# Altium PCB PCB_Sensores_PIC24.PcbDoc (part 1 of 2)
Units mm, origin at the board's own origin, x right, y up, seen from the top; angles counter-clockwise.
Board outline 86.12 x 83.94 mm, 4 copper layers (Top Layer, Layer 1, Layer 4, Bottom Layer), stack 0.603 mm thick; 128 components, 84 nets, 499 pads, 63 vias.
Unrouted connection lines stored in the file: 68.
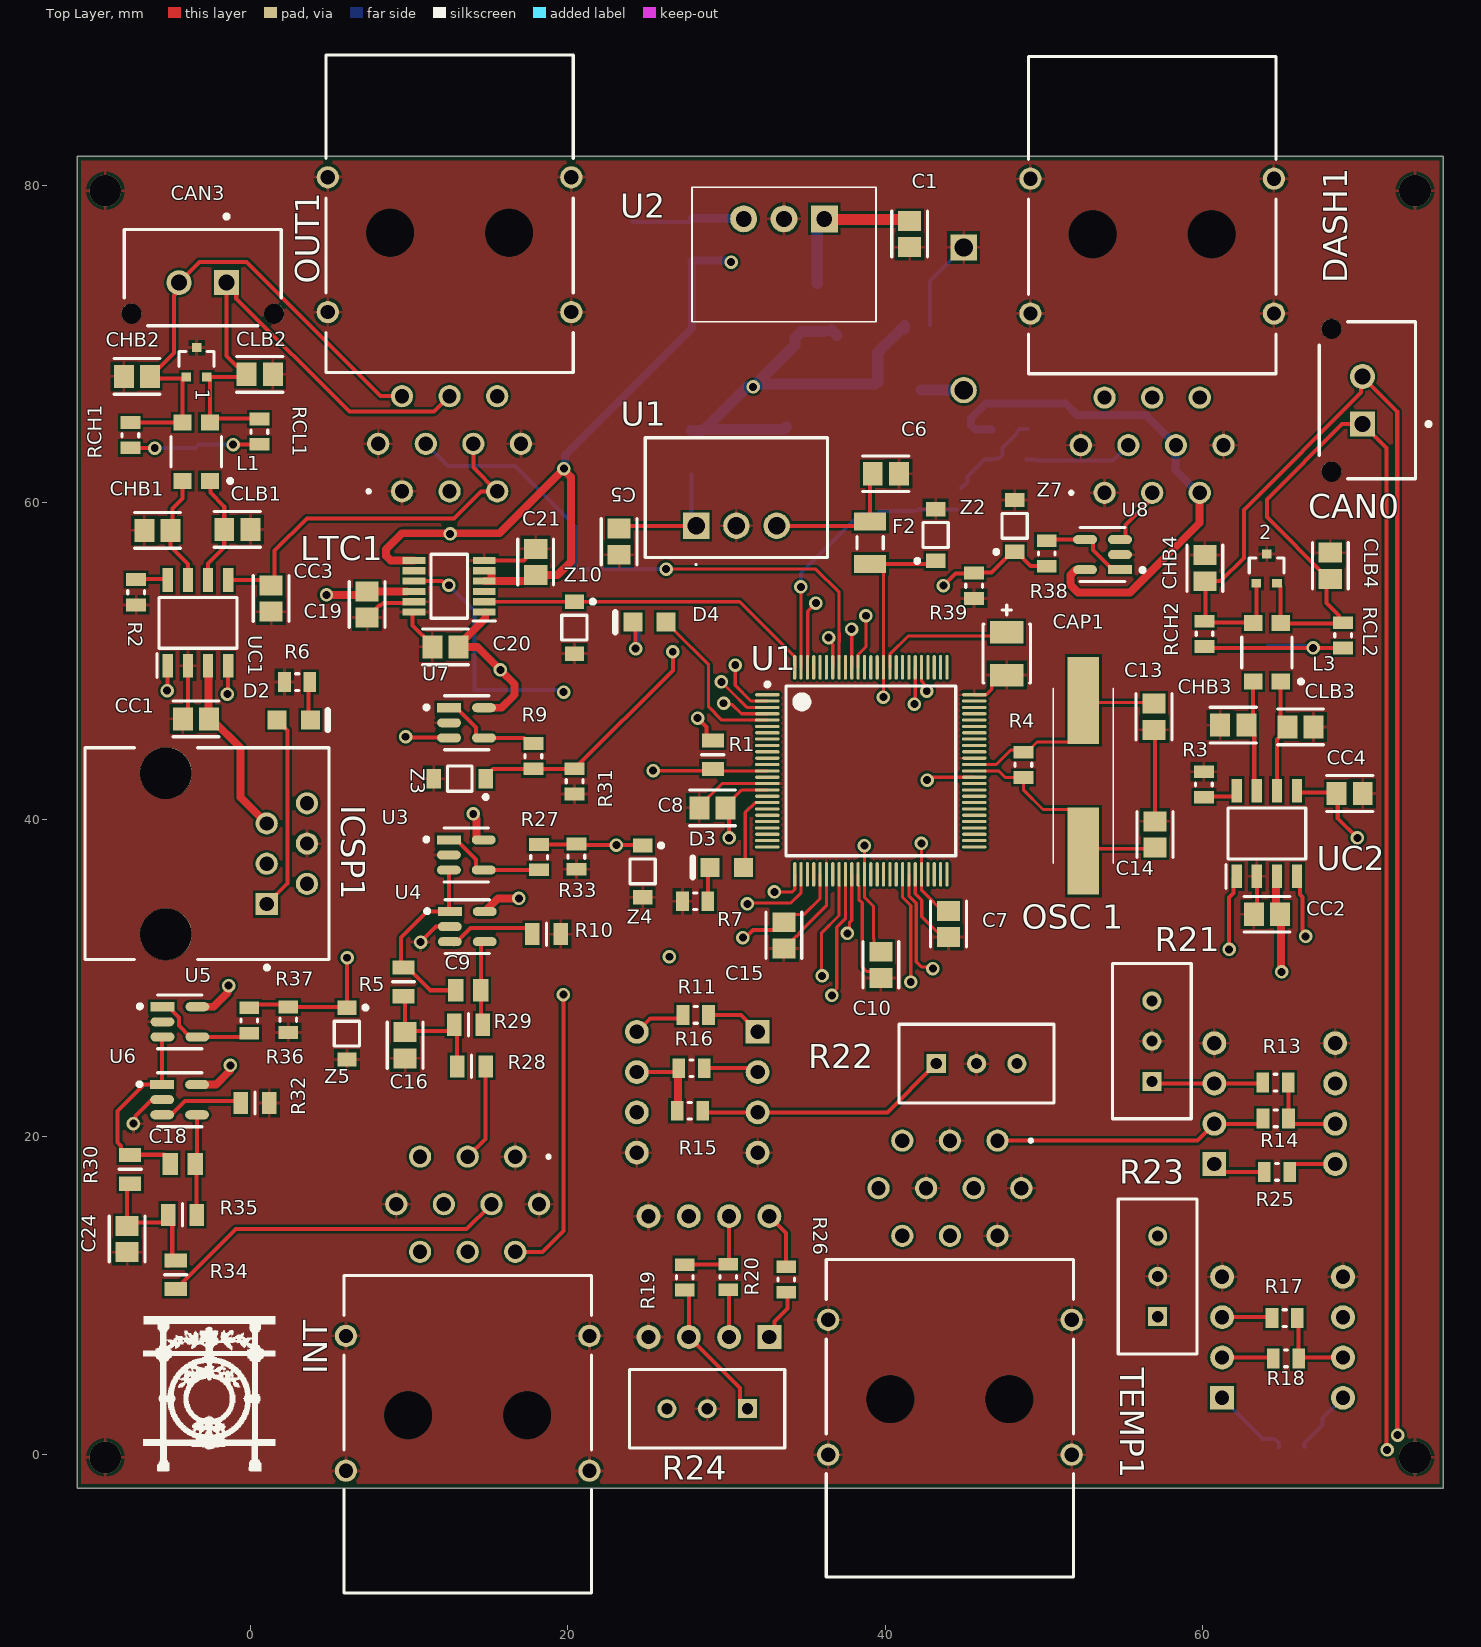
[diagram p0: Top Layer view]
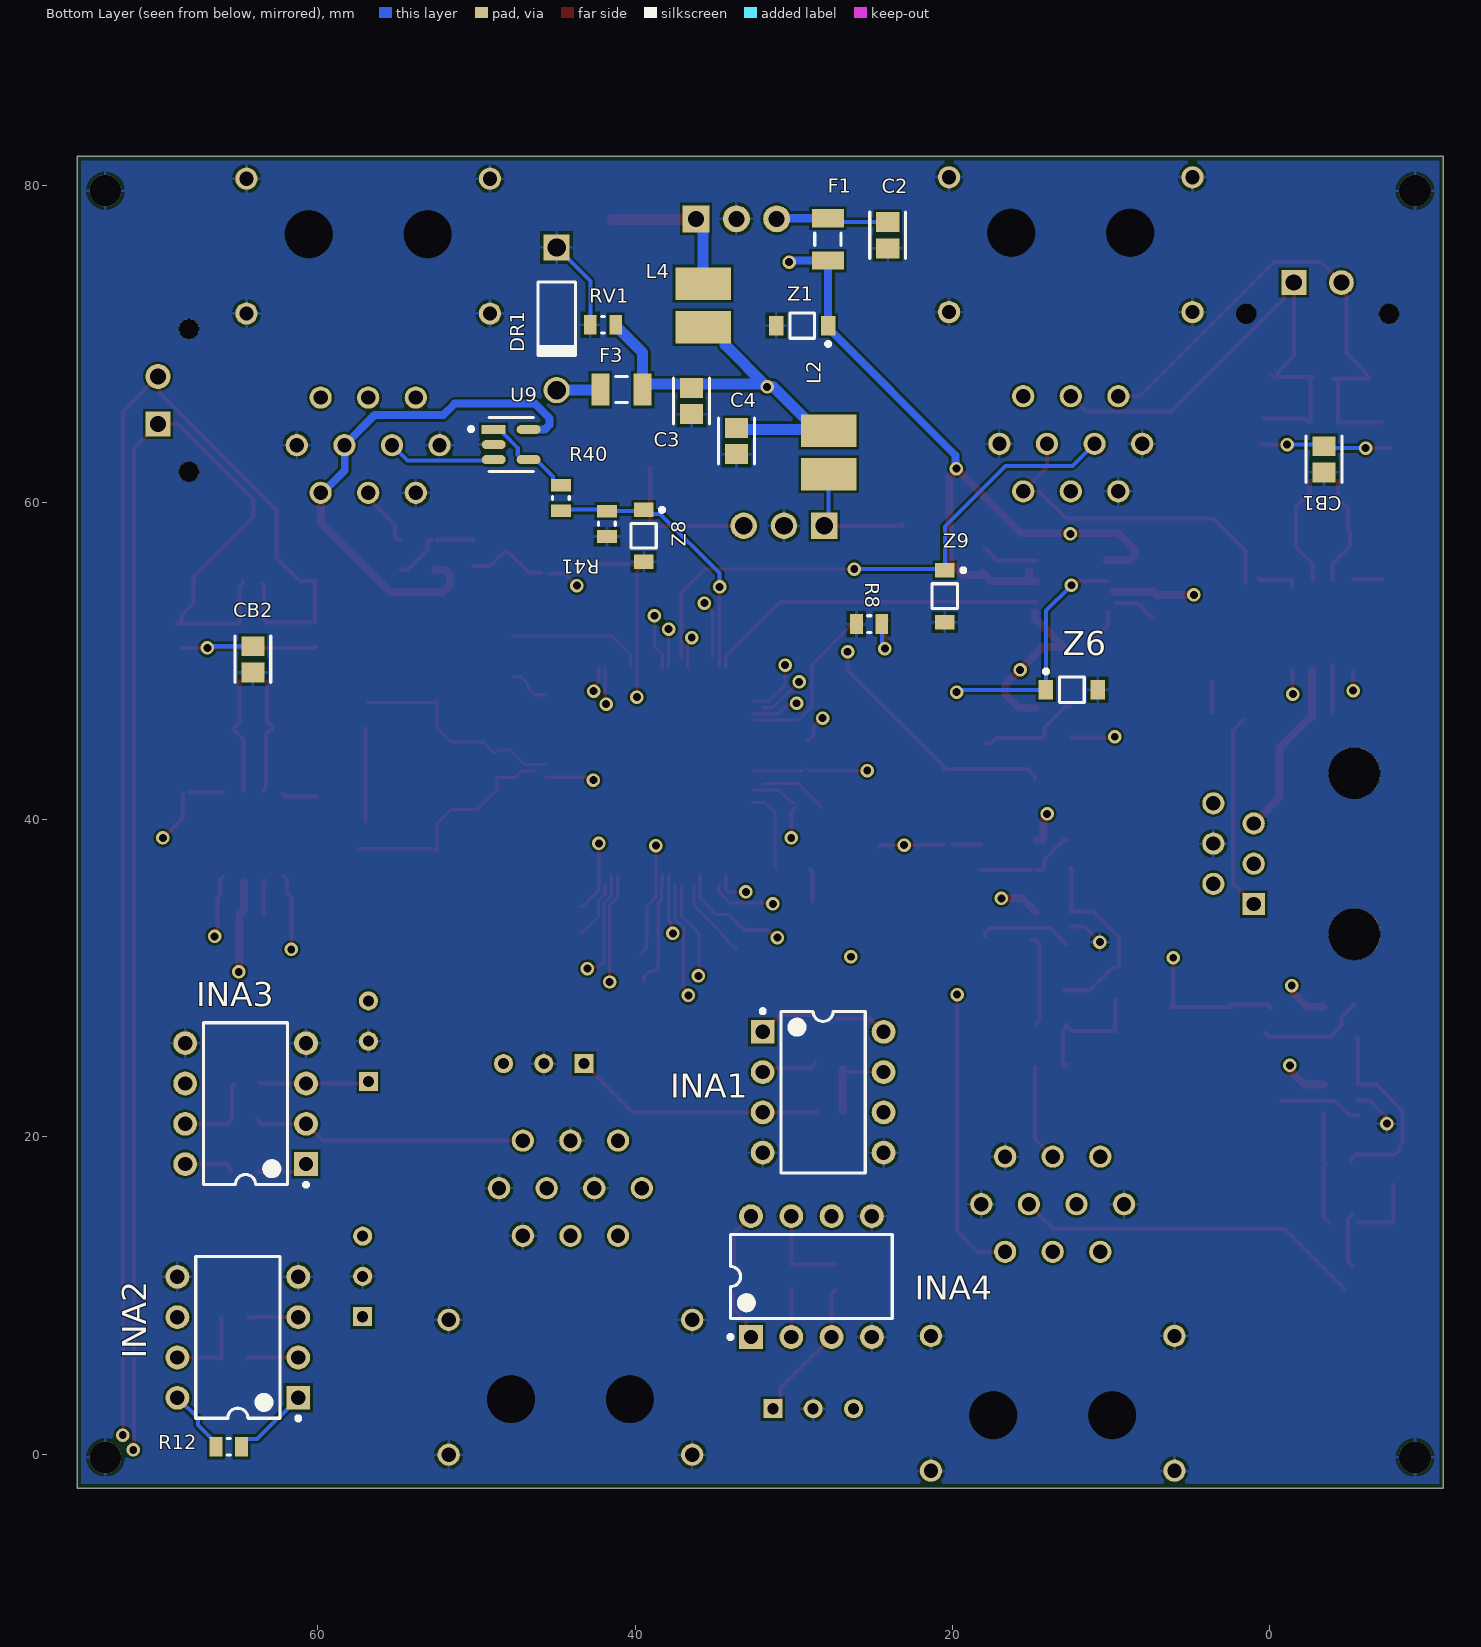
[diagram p1: Bottom Layer view, seen from below]
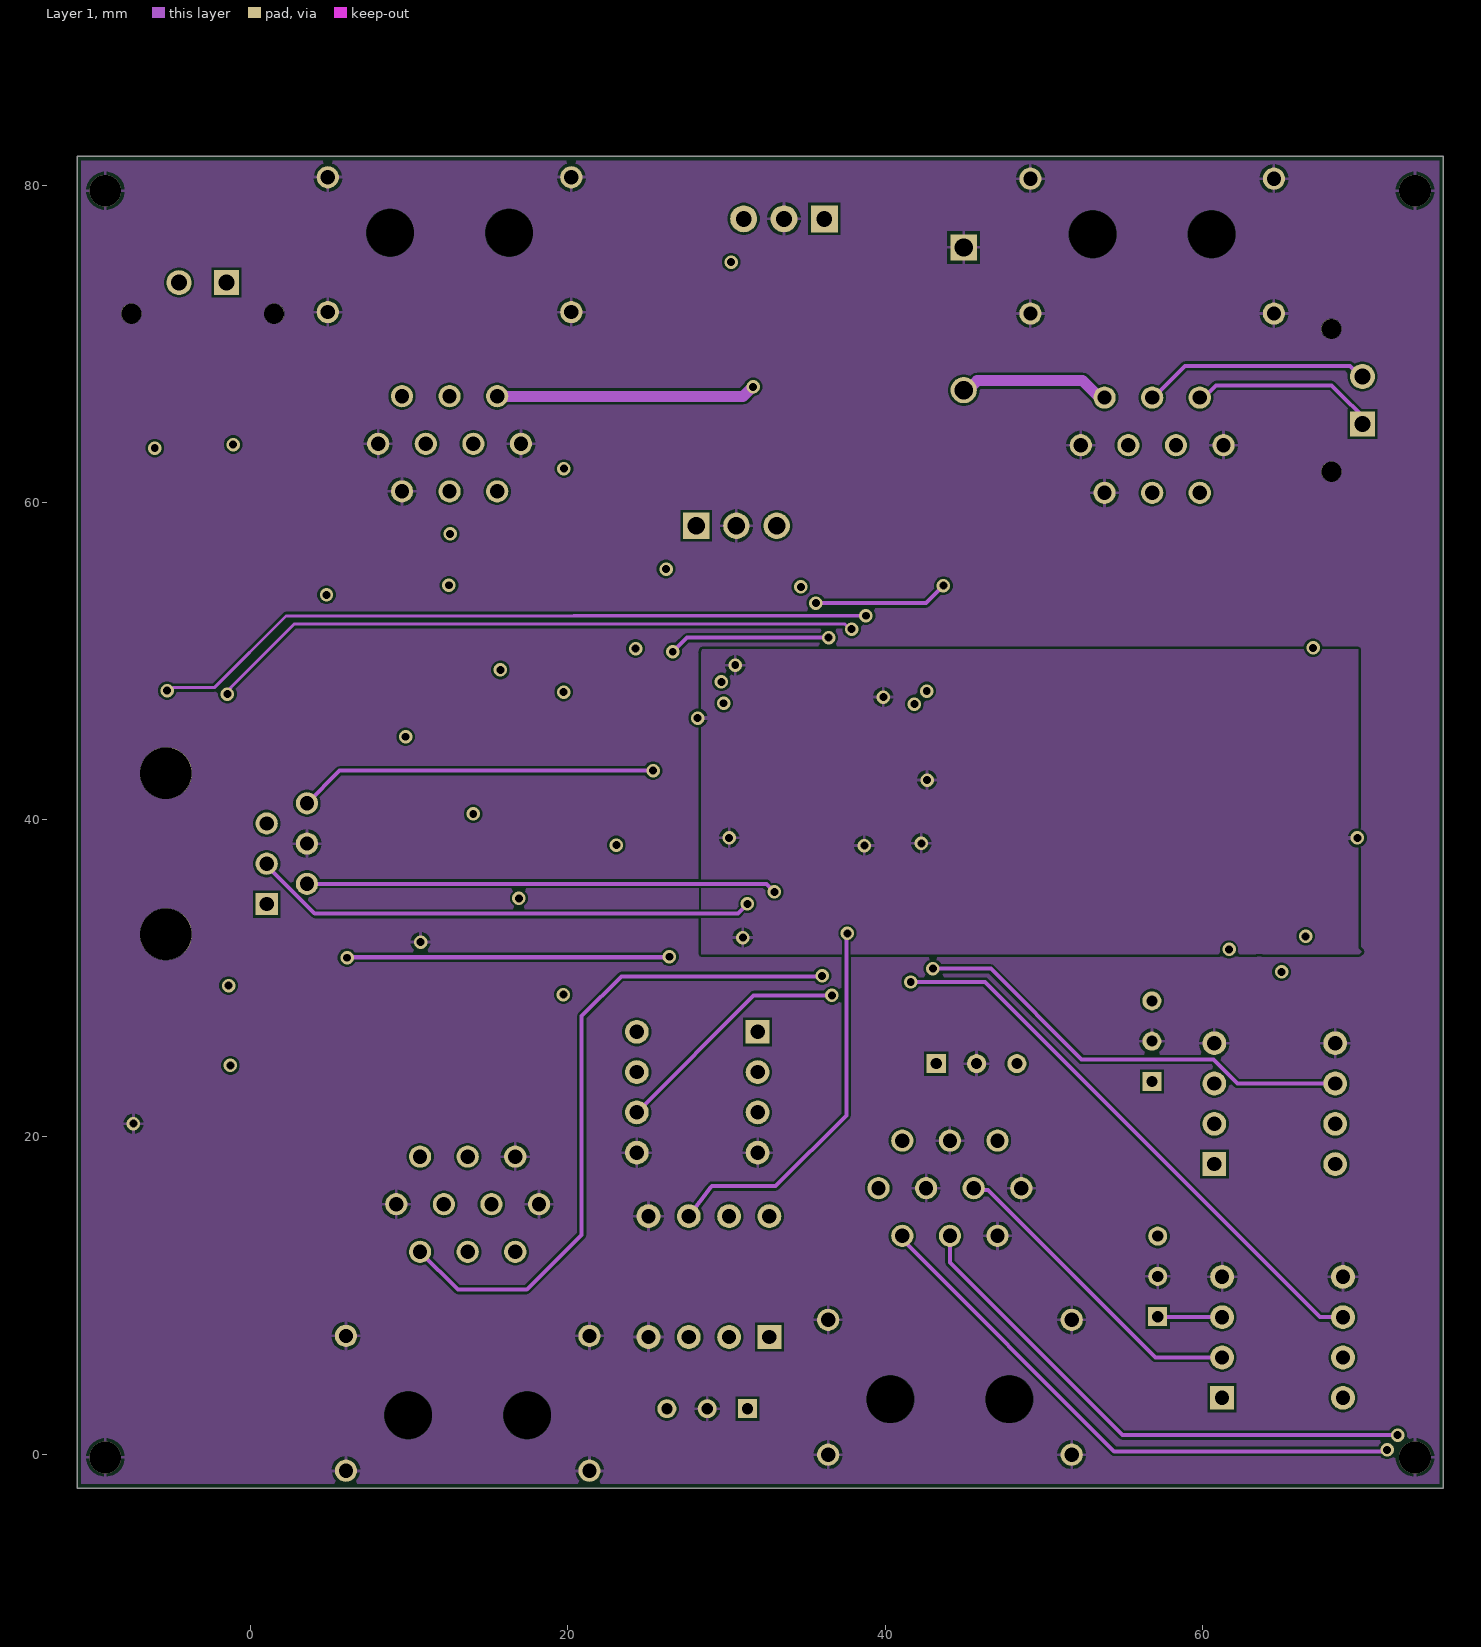
[diagram p2: Layer 1]
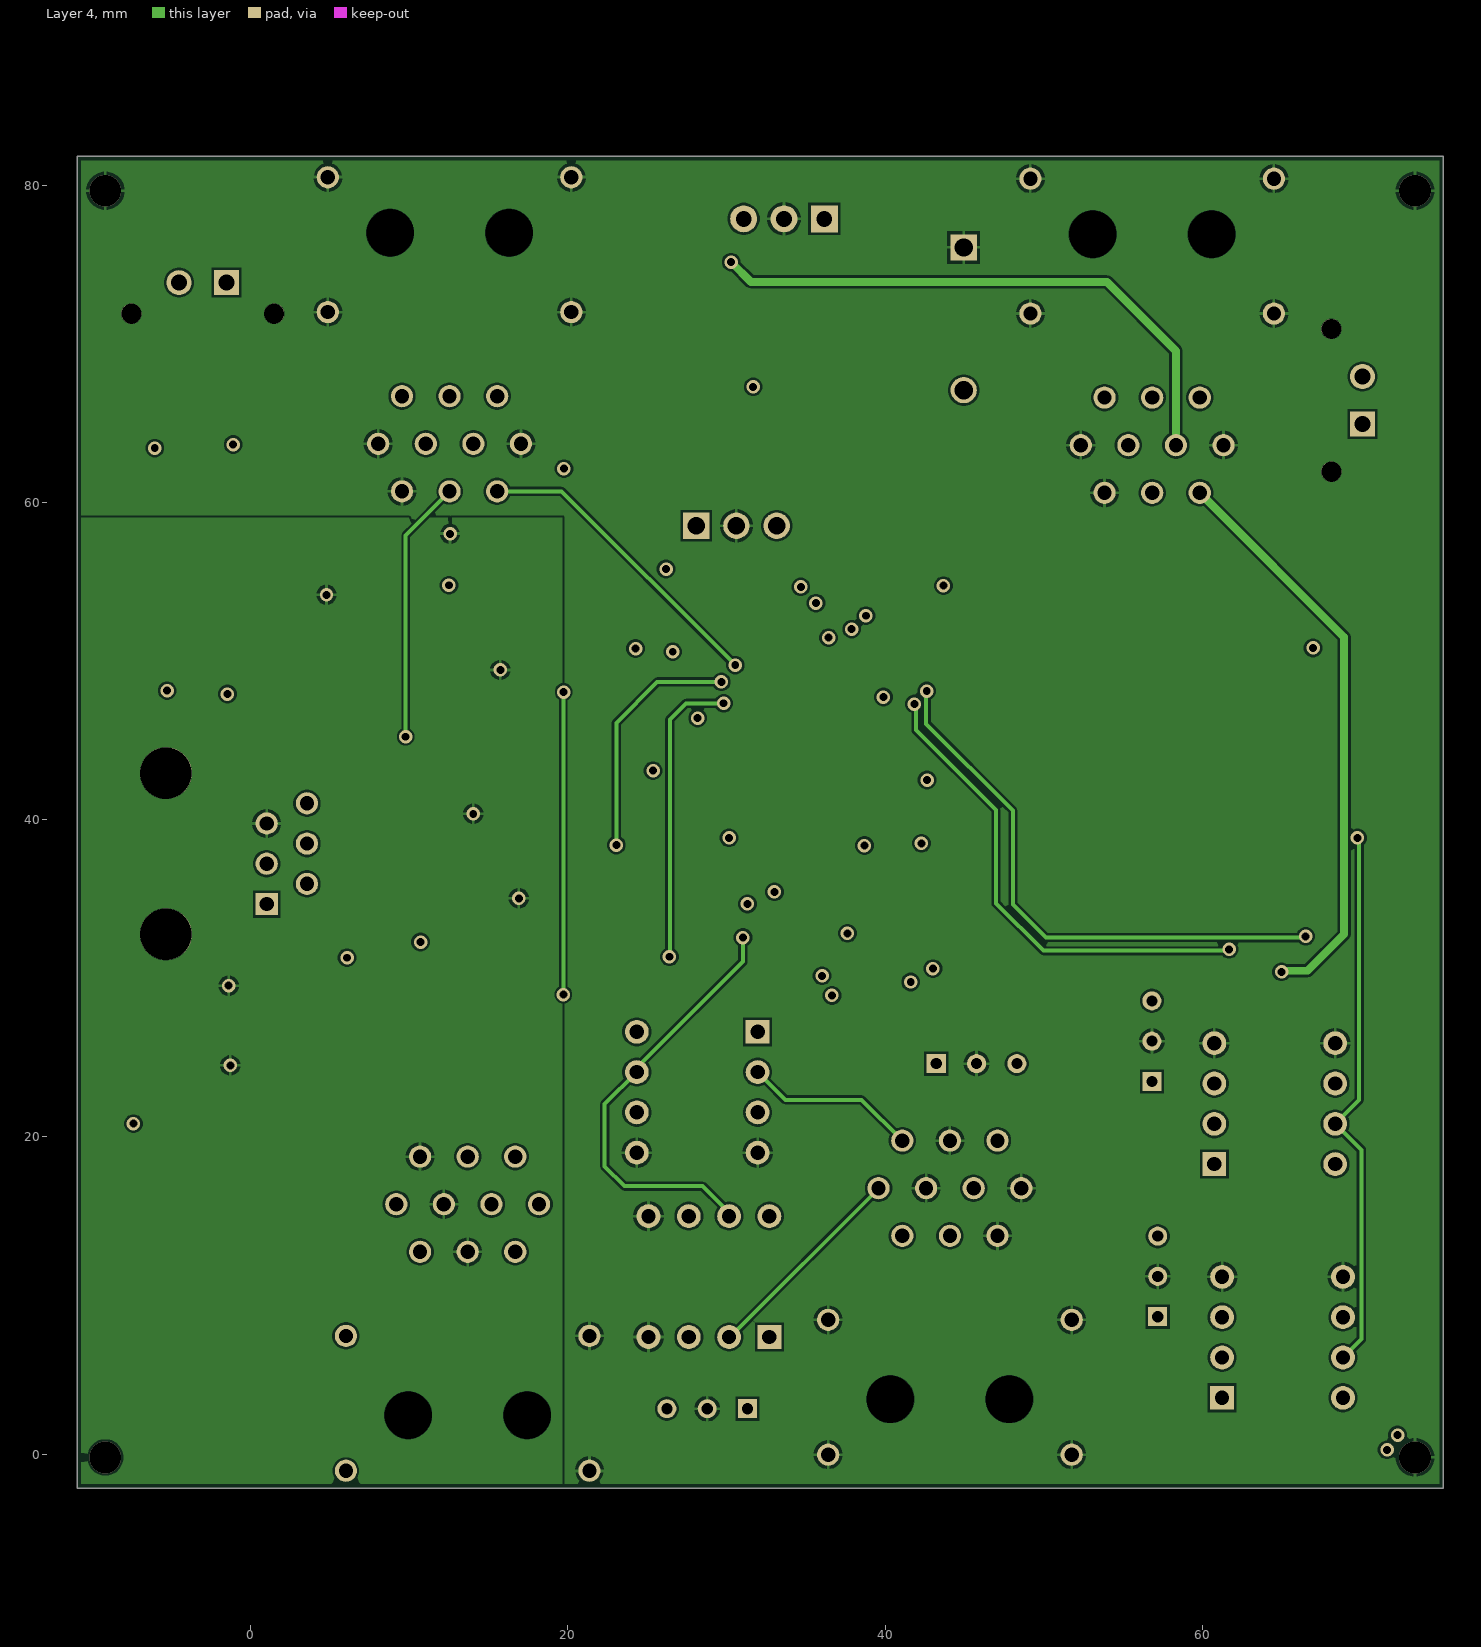
[diagram p3: Layer 4]
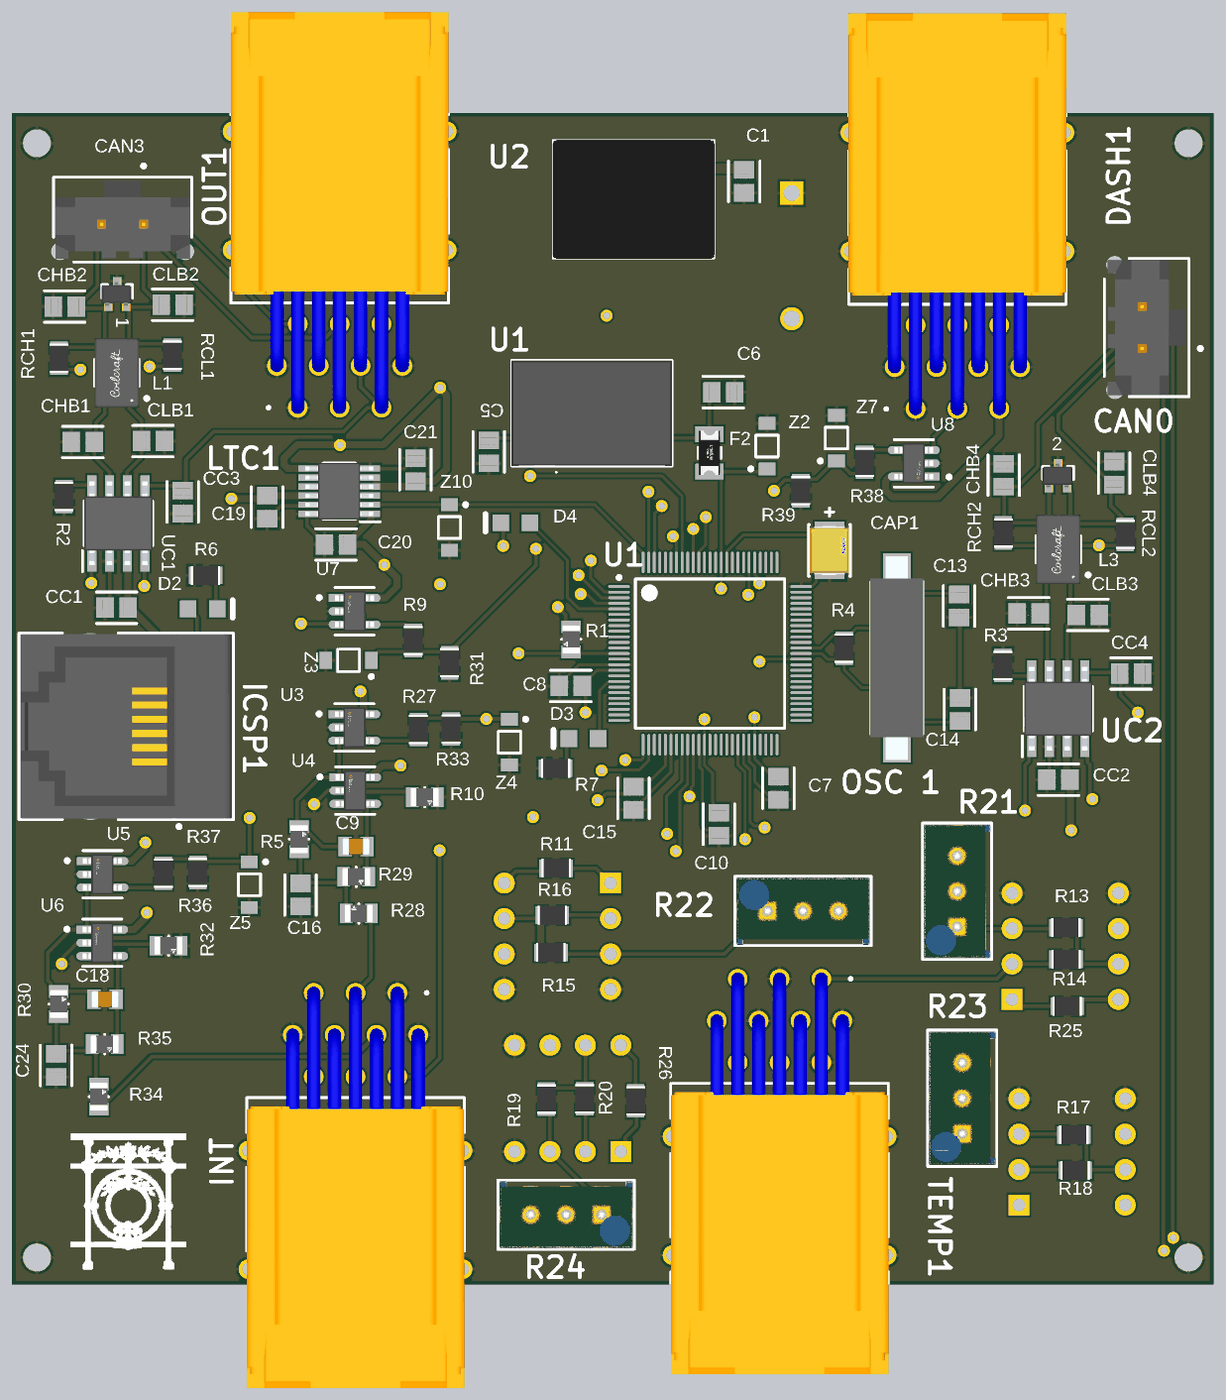
[diagram p5: 3D render of the assembled board from above, using the file's embedded part models]
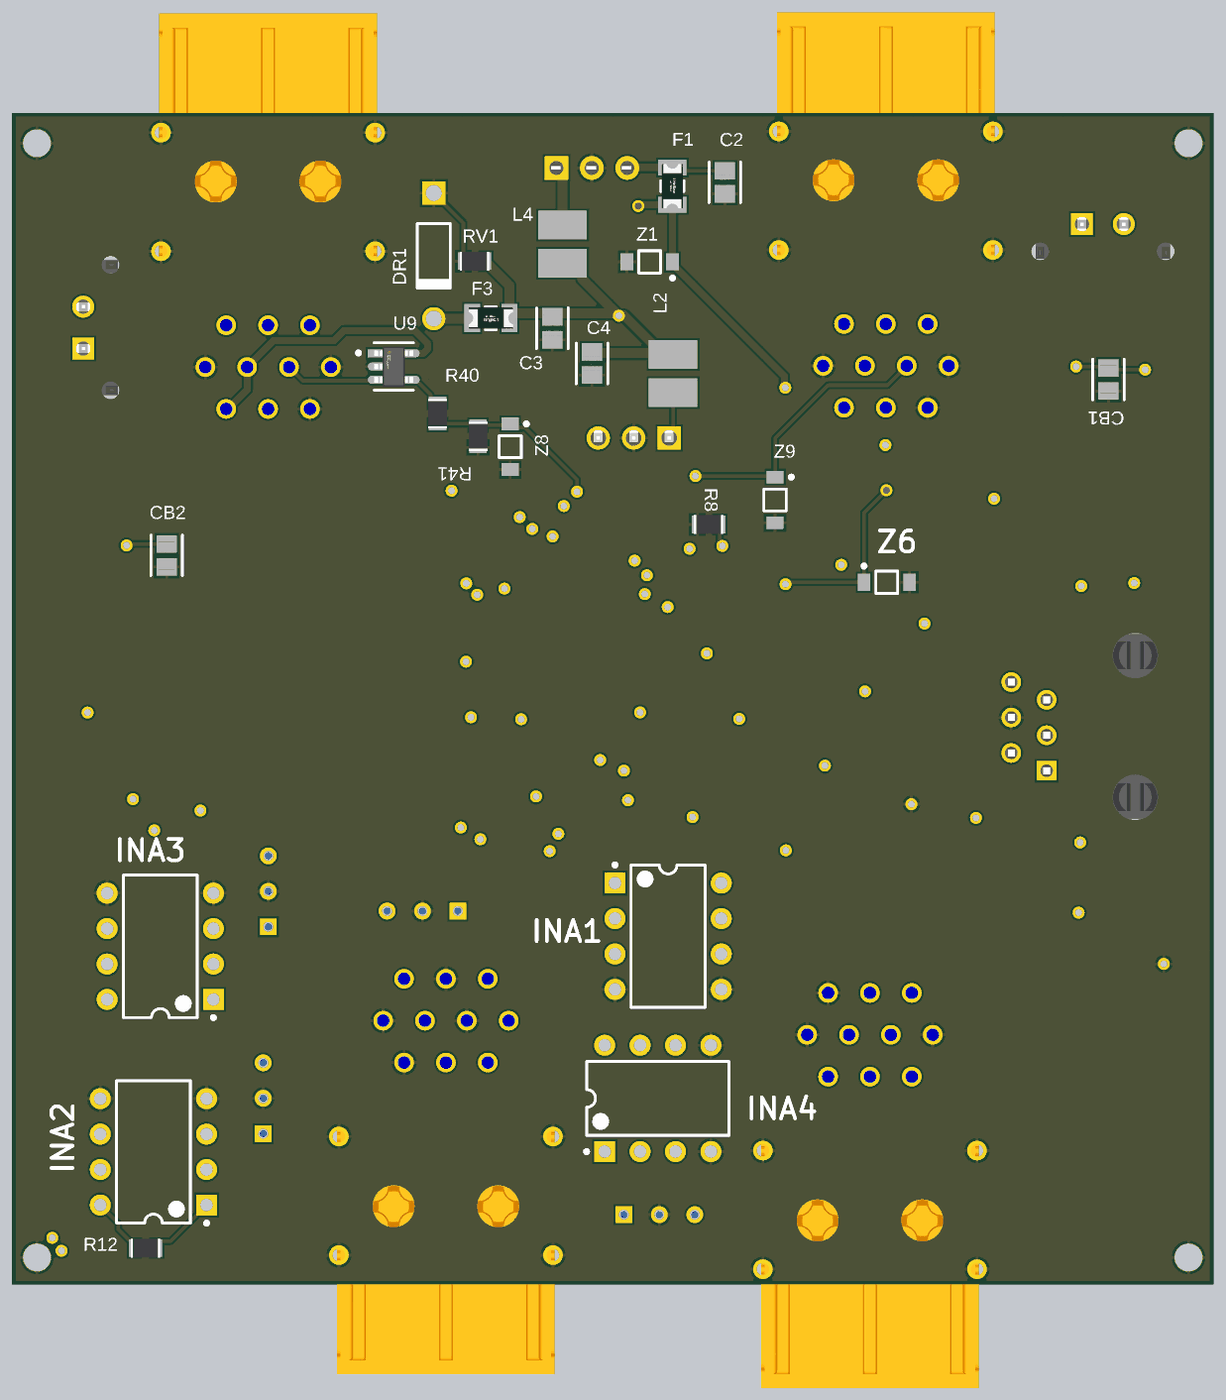
[diagram p6: 3D render of the assembled board from below, using the file's embedded part models]

## Layer stack, top to bottom
Top Solder: solder mask 0.0102, Solder Resist, Dk 3.5
Top Layer: signal copper 0.0356
Dielectric 2: prepreg 0.0711, PP-006, Dk 4.1
Layer 1: signal copper 0.035
Dielectric 1: dielectric 0.32, FR-4, Dk 4.8
Layer 4: signal copper 0.035
Dielectric 5: prepreg 0.0711, PP-006, Dk 4.1
Bottom Layer: signal copper 0.0356
Bottom Solder: solder mask 0.0102, Solder Resist, Dk 3.5

## Board outline
-10.94,-2.13 -10.94,81.81 75.18,81.81 75.18,-2.13

## Design rules (kind name [scope] priority, off if disabled: settings)
BoardOutlineClearance [All] p1: gap=0.25 ignorepadtopadclearanceinfootprint=FALSE except(0: Arc-SplitContinuation Track-SplitContinuation SMDPad-SplitContinuation THPad-SplitContinuation Via-SplitContinuation Fill-SplitContinuation Poly-SplitContinuation Region-SplitContinuation Text-SplitContinuation)
Clearance Clearance-xPP-xTP-xTT [All] p1: gap=0.15 ignorepadtopadclearanceinfootprint=FALSE except(0: Arc-Hole Track-Hole SMDPad-Hole THPad-Hole Via-Hole Fill-Hole Poly-Hole Region-Hole Text-Hole)
ComponentClearance [All] p1: gap=0.25 collisioncheckmode=3 verticalgap=0.25 showdistances=FALSE
DiffPairsRouting [All] p1: maxlimit=0.25 minlimit=0.25 mostfreqgap=0.25 toplayer_minwidth=0.381 toplayer_maxwidth=0.381 toplayer_prefwidth=0.381 midlayer1_minwidth=0.381 midlayer1_maxwidth=0.381 midlayer1_prefwidth=0.381 midlayer2_minwidth=0.381 midlayer2_maxwidth=0.381 midlayer2_prefwidth=0.381 bottomlayer_minwidth=0.381 bottomlayer_maxwidth=0.381 bottomlayer_prefwidth=0.381 maxuncoupledlength=12.5
Height [All] p1: minheight=0 maxheight=40 prefheight=12.5
HoleSize HoleSize-PTH [All] p1: absolutevalues=TRUE maxlimit=2 minlimit=0.25 maxpercent=80.000 minpercent=20.000
HoleToHoleClearance [All] p1: gap=0.35 allowstackedmicrovias=TRUE
MinimumAnnularRing "Minimum IAR  >0.45mm" [((ObjectKind = 'Pad') OR (ObjectKind = 'Via')) And (Layer = 'MultiLayer') And (HoleDiameter > AsMM(0.45))] p1: minimumring=0.175 // minimum inner annular ring for pads > 0.45mm finished hole size
MinimumAnnularRing "Minimum IAR <=0.45mm" [((ObjectKind = 'Pad') OR (ObjectKind = 'Via')) And (Layer = 'MultiLayer') And (HoleDiameter <= AsMM(0.45))] p2: minimumring=0.175 // minimum inner annular ring for pads <= 0.45mm finished hole size
MinimumSolderMaskSliver [All] p1: minsoldermaskwidth=0.08
PlaneClearance PlaneClearance-IPI [All] p1: clearance=0.25
PlaneConnect [All] p1: planeconnectstyle=Relief reliefexpansion=0.175 reliefentries=4 reliefconductorwidth=0.2 reliefairgap=0.2
PolygonConnect PolygonConnect-xTW [All] p1: connectstyle=Relief reliefconductorwidth=0.2 reliefentries=4 polygonreliefangle="90 Angle" airgapwidth=0.2
RoutingCorners [All] p1: cornerstyle=45-Degree minsetback=2.5 maxsetback=2.5
RoutingVias "RoutingVias > 0.45mm" [(ObjectKind = 'Via') And (HoleDiameter > AsMM(0.45))] p1: holewidth=0.5 width=0.85 viastyle="Through Hole" minholewidth=0.5 minwidth=0.85 maxholewidth=0.9 maxwidth=1.25 // finishet hole size > 0.45mm
RoutingVias "RoutingVias <= 0.45mm" [(ObjectKind = 'Via') And (HoleDiameter <= AsMM(0.45))] p2: holewidth=0.3 width=0.65 viastyle="Through Hole" minholewidth=0.25 minwidth=0.6 maxholewidth=0.45 maxwidth=0.8 // finishet hole size <= 0.45mm
SilkToSilkClearance [All] p1: silktosilkclearance=0.2
SilkToSolderMaskClearance SilkscreenOverComponentPads [IsPad] p1: minsilkscreentomaskgap=0.2 clearancetoexposedcopper=TRUE
SolderMaskExpansion [All] p1: expansion=0 istentingtop=FALSE
SupplyNets "Schematic Supply Nets_4" [InNet('GND')] p1: voltage=0.000
SupplyNets "Schematic Supply Nets_2" [InNet('3.3V')] p2: voltage=0.000
SupplyNets "Schematic Supply Nets_1" [InNet('+5')] p3: voltage=0.000
SupplyNets "Schematic Supply Nets" [InNet('24V')] p4: voltage=0.000
UnRoutedNet [All] p1: checkbadconnections=TRUE
Width Width_24v [InNet('24V')] p1: maxlimit=1 minlimit=0.5 preferedwidth=0.7 minimp=50.000000 maximp=50.000000 favimp=50.000000
Width Width_5v [InNet('+5')] p2: maxlimit=0.6 minlimit=0.4 preferedwidth=0.5 minimp=50.000000 maximp=50.000000 favimp=50.000000
Width [All] p3: maxlimit=0.7 minlimit=0.2 preferedwidth=0.254 minimp=50.000000 maximp=50.000000 favimp=50.000000
18 further rules are at their usual default settings.

## Components (designator, comment, footprint, x,y, rotation, side; value= is the part's Value field where it differs from the comment)
1 "PESD1CAN-UX" FP-SOT323-MFG -3.41,68.84 r90 top
2 "PESD1CAN-UX" FP-SOT323-MFG 64.05,55.825 r90 top
C1 "CL21F105ZAFNNNF" FP-CL21-IPC_B 41.54,76.92 r270 top value=10uF
C2 "CL21F105ZAFNNNF" FP-CL21-IPC_B 24.08,76.846 r270 bottom value=1uF
C3 "CL21F105ZAFNNNF" FP-CL21-IPC_B 36.45,66.39 r270 bottom value=10uF
C4 "CL21F105ZAFNNNF" FP-CL21-IPC_B 33.61,63.87 r270 bottom value=10uF
C5 "CL21F105ZAFNNNF" FP-CL21-IPC_B 23.23,57.53 r270 top value=10uF
C6 "CL21F105ZAFNNNF" FP-CL21-IPC_B 40.04,61.81 r0 top value=1uF
C7 "CL21F105ZAFNNNF" FP-CL21-IPC_B 43.99,33.43 r270 top value=100nF
C8 "CL21F105ZAFNNNF" FP-CL21-IPC_B 29.114,40.75 r180 top value=100nF
C9 "2.7nF" TMK212BJ105KG-T-Footprint-1 13.716,29.25 r180 top value=1uF
C10 "CL21F105ZAFNNNF" FP-CL21-IPC_B 39.73,30.85 r270 top value=100nF
C13 "CL21F105ZAFNNNF" FP-CL21-IPC_B 56.95,46.49 r270 top value=10pF
C14 "CL21F105ZAFNNNF" FP-CL21-IPC_B 57.01,39.07 r90 top value=10pF
C15 "CL21F105ZAFNNNF" FP-CL21-IPC_B 33.61,32.71 r270 top value=100nF
C16 "CL21F105ZAFNNNF" FP-CL21-IPC_B 9.736,25.78 r270 top value=10nF
C18 "2.7nF" TMK212BJ105KG-T-Footprint-1 -4.28,18.3 r180 top value=1uF
C19 "CL21F105ZAFNNNF" FP-CL21-IPC_B 7.34,53.57 r270 top value=0.1uF
C20 "CL21F105ZAFNNNF" FP-CL21-IPC_B 12.28,50.9 r180 top value=0.1uF
C21 "CL21F105ZAFNNNF" FP-CL21-IPC_B 17.97,56.25 r90 top value=0.1uF
C24 "CL21F105ZAFNNNF" FP-CL21-IPC_B -7.79,13.564 r270 top value=10nF
CAN0 "Molex 2" FP-43650-0228-MFG 70.4,66.44 r270 top
CAN3 "Molex 2" FP-43650-0228-MFG -3.02,74.175 r0 top
CAP1 "10uF" FP-T491B226K016AT-MFG 47.66,50.47 r90 top
CB1 "CL21F105ZAFNNNF" FP-CL21-IPC_B -3.42,62.72 r270 bottom value=100nF
CB2 "CL21F105ZAFNNNF" FP-CL21-IPC_B 64.1,50.11 r270 bottom value=100nF
CC1 "CL21F105ZAFNNNF" FP-CL21-IPC_B -3.45,46.36 r180 top value=100nF
CC2 "CL21F105ZAFNNNF" FP-CL21-IPC_B 64.07,34.04 r180 top value=100nF
CC3 "CL21F105ZAFNNNF" FP-CL21-IPC_B 1.29,53.94 r90 top value=100nF
CC4 "CL21F105ZAFNNNF" FP-CL21-IPC_B 69.28,41.65 r180 top value=100nF
CHB1 "CL21F105ZAFNNNF" FP-CL21-IPC_B -5.876,58.24 r180 top value=22pF
CHB2 "CL21F105ZAFNNNF" FP-CL21-IPC_B -7.17,67.95 r180 top value=22pF
CHB3 "CL21F105ZAFNNNF" FP-CL21-IPC_B 61.94,45.96 r180 top value=22pF
CHB4 "CL21F105ZAFNNNF" FP-CL21-IPC_B 60.15,55.86 r90 top value=22pF
CLB1 "CL21F105ZAFNNNF" FP-CL21-IPC_B -0.84,58.3 r0 top value=22pF
CLB2 "CL21F105ZAFNNNF" FP-CL21-IPC_B 0.57,68.08 r0 top value=22pF
CLB3 "CL21F105ZAFNNNF" FP-CL21-IPC_B 66.18,45.85 r0 top value=22pF
CLB4 "CL21F105ZAFNNNF" FP-CL21-IPC_B 68.06,56.01 r90 top value=22pF
D2 "HSMG-C170" AVAG-HSMX-C170_V 2.72,46.28 r0 top
D3 "HSMG-C170" AVAG-HSMX-C170_V 30.02,36.99 r180 top
D4 "HSMG-C170" AVAG-HSMX-C170_V 25.14,52.45 r180 top
DASH1 "09455459011" 09455459011 53.83,60.61 r90 top
DR1 "1N4001-T" DIOD-DO-41-P-2_V 44.95,71.58 r270 bottom value=15pF
F1 "0466001.NR" FP-0466-MFG 27.85,76.58 r270 bottom value=72mR
F2 "0466001.NR" FP-0466-MFG 39.05,57.46 r270 top value=72mR
F3 "0466001.NR" FP-0466-MFG 40.863,67.12 r0 bottom value=72mR
ICSP1 "95503-2661" FP-95503-2661-MFG -2.76,37.86 r270 top
INA1 "INA121PA" P0008A 28.15,22.82 r180 bottom
INA2 "INA121PA" P0008A 65.05,7.37 r0 bottom
INA3 "INA121PA" P0008A 64.56,22.1 r0 bottom
INA4 "INA121PA" P0008A 28.89,11.2 r90 bottom
INT "09455459011" 09455459011 16.68,18.76 r270 top
L1 "1812CAN-104NRC" FP-1812CAN-MFG -3.43,63.2 r90 top
L2 "RLS-126" IND_RLS-126 27.8,63.15 r270 bottom value=12uH
L3 "1812CAN-104NRC" FP-1812CAN-MFG 64.065,50.55 r90 top
L4 "RLS-126" IND_RLS-126 35.72,72.42 r90 bottom value=12uH
LTC1 "LTC2644CMS-L12#PBF" SOP65P490X110-12N 12.51,54.72 r180 top
"OSC 1" "Crystal 20MHZ SMD" LFXTAL003181-Footprint-1 52.49,42.77 r270 top
OUT1 "09455459011" 09455459011 9.54,60.7 r90 top
R1 "MCU08050D1002BP100" FP-MCU0805-MFG 29.14,44.1 r270 top value=10kR
R2 "RC0805FR-0710KL" RESC2013X60X35LL10T20 -7.22,54.34 r270 top value=10k
R3 "RC0805FR-0710KL" RESC2013X60X35LL10T20 60.09,42.22 r90 top value=10k
R4 "RC0805FR-0710KL" RESC2013X60X35LL10T20 48.71,43.46 r270 top value=1MR
R5 "MCU08050D1002BP100" FP-MCU0805-MFG 9.636,29.78 r90 top value=220K
R6 "RC0805FR-0710KL" RESC2013X60X35LL10T20 2.93,48.68 r0 top value=330
R7 "RC0805FR-0710KL" RESC2013X60X35LL10T20 28.02,34.86 r0 top value=330
R8 "RC0805FR-0710KL" RESC2013X60X35LL10T20 25.25,52.33 r180 bottom value=330
R9 "RC0805FR-0710KL" RESC2013X60X35LL10T20 17.82,44.01 r90 top value=10k
R10 "MCU08050D1002BP100" FP-MCU0805-MFG 18.65,32.79 r0 top value=220K
R11 "RC0805FR-0710KL" RESC2013X60X35LL10T20 28.06,27.69 r0 top value=10kR
R12 "RC0805FR-0710KL" RESC2013X60X35LL10T20 65.62,0.47 r180 bottom value=10kR
R13 "RC0805FR-0710KL" RESC2013X60X35LL10T20 64.61,23.43 r0 top value=10kR
R14 "RC0805FR-0710KL" RESC2013X60X35LL10T20 64.62,21.17 r180 top value=10kR
R15 "RC0805FR-0710KL" RESC2013X60X35LL10T20 27.69,21.655 r180 top value=10kR
R16 "RC0805FR-0710KL" RESC2013X60X35LL10T20 27.79,24.33 r0 top value=10kR
R17 "RC0805FR-0710KL" RESC2013X60X35LL10T20 65.18,8.58 r0 top value=10kR
R18 "RC0805FR-0710KL" RESC2013X60X35LL10T20 65.27,6.04 r180 top value=10kR
R19 "RC0805FR-0710KL" RESC2013X60X35LL10T20 27.37,11.15 r90 top value=10kR
R20 "RC0805FR-0710KL" RESC2013X60X35LL10T20 30.11,11.17 r270 top value=10kR
R21 "3296W-1-202LF" FP-3296W-MFG 56.81,26.04 r0 top value=20k
R22 "3296W-1-202LF" FP-3296W-MFG 45.76,24.63 r270 top value=20k
R23 "3296W-1-202LF" FP-3296W-MFG 57.175,11.21 r0 top value=20k
R24 "3296W-1-202LF" FP-3296W-MFG 28.78,2.865 r90 top value=20k
R25 "RC0805FR-0710KL" RESC2013X60X35LL10T20 64.7,17.8 r180 top value=10kR
R26 "RC0805FR-0710KL" RESC2013X60X35LL10T20 33.76,11.02 r270 top value=10kR
R27 "RC0805FR-0710KL" RESC2013X60X35LL10T20 18.186,37.64 r270 top value=10k
R28 "MCU08050D1002BP100" FP-MCU0805-MFG 13.916,24.45 r180 top value=220K
R29 "MCU08050D1002BP100" FP-MCU0805-MFG 13.726,27.08 r0 top value=110K
R30 "MCU08050D1002BP100" FP-MCU0805-MFG -7.6,17.96 r90 top value=220K
R31 "RC0805FR-0710KL" RESC2013X60X35LL10T20 20.42,42.42 r270 top value=20k
R32 "MCU08050D1002BP100" FP-MCU0805-MFG 0.28,22.14 r0 top value=220K
R33 "RC0805FR-0710KL" RESC2013X60X35LL10T20 20.536,37.67 r270 top value=20k
R34 "MCU08050D1002BP100" FP-MCU0805-MFG -4.72,11.32 r90 top value=220K
R35 "MCU08050D1002BP100" FP-MCU0805-MFG -4.3,15.09 r0 top value=110K
R36 "RC0805FR-0710KL" RESC2013X60X35LL10T20 -0.09,27.34 r270 top value=10k
R37 "RC0805FR-0710KL" RESC2013X60X35LL10T20 2.37,27.39 r270 top value=20k
R38 "RC0805FR-0710KL" RESC2013X60X35LL10T20 50.18,56.78 r90 top value=10k
R39 "RC0805FR-0710KL" RESC2013X60X35LL10T20 45.6,54.75 r270 top value=20k
R40 "RC0805FR-0710KL" RESC2013X60X35LL10T20 44.68,60.28 r90 bottom value=10k
R41 "RC0805FR-0710KL" RESC2013X60X35LL10T20 41.78,58.65 r270 bottom value=20k
RCH1 "RC0805FR-0710KL" RESC2013X60X35LL10T20 -7.58,64.24 r90 top value=60
RCH2 "RC0805FR-0710KL" RESC2013X60X35LL10T20 60.13,51.72 r90 top value=60
RCL1 "RC0805FR-0710KL" RESC2013X60X35LL10T20 0.55,64.46 r90 top value=60
RCL2 "RC0805FR-0710KL" RESC2013X60X35LL10T20 68.87,51.62 r90 top value=60
RV1 "VCAS080530C650DP" VCAS080530C650DP-Footprint-1 40.633,71.835 r0 bottom value=250pF
TEMP1 "09455459011" 09455459011 47.08,19.77 r270 top
U1 "R-78K3.3-1.0" BGA81C100P9X9_1100X1100X350 28.08,58.53 r0 top
U1 "PIC24EP512GU810-I/PT" TQFP-PT100_L 39.095,43.08 r0 top
U2 "R-78C5.0-1.0" R-78C5.0-1.0-Footprint-1 36.16,77.88 r180 top
U3 "OPA990IDBVR" FP-DBV0005A-IPC_B 13.596,37.78 r0 top
U4 "OPA990IDBVR" FP-DBV0005A-IPC_B 13.656,33.26 r0 top
U5 "OPA990IDBVR" FP-DBV0005A-IPC_B -4.46,27.26 r0 top
U6 "OPA990IDBVR" FP-DBV0005A-IPC_B -4.48,22.35 r0 top
U7 "OPA990IDBVR" FP-DBV0005A-IPC_B 13.61,46.11 r0 top
U8 "OPA990IDBVR" FP-DBV0005A-IPC_B 53.7,56.712 r180 top
U9 "OPA990IDBVR" FP-DBV0005A-IPC_B 47.82,63.65 r180 bottom
UC1 "MCP2562FDT-E_SN" SOIC127P600X175-8N -3.32,52.41 r90 top
UC2 "MCP2562FDT-E_SN" SOIC127P600X175-8N 64.06,39.13 r90 top
Z1 "Zener 3.6" ONSC-SOD-123-2-425-04_V 29.47,71.15 r0 bottom
Z2 "Zener 3.6" ONSC-SOD-123-2-425-04_V 43.18,57.95 r90 top
Z3 "Zener 3.3" ONSC-SOD-123-2-425-04_V 13.18,42.59 r180 top
Z4 "Zener 3.3" ONSC-SOD-123-2-425-04_V 24.71,36.74 r270 top
Z5 "Zener 3.3" ONSC-SOD-123-2-425-04_V 6.07,26.52 r270 top
Z6 "Zener 3.3" ONSC-SOD-123-2-425-04_V 12.47,48.19 r180 bottom
Z7 "Zener 3.3" ONSC-SOD-123-2-425-04_V 48.16,58.52 r90 top
Z8 "Zener 3.3" ONSC-SOD-123-2-425-04_V 39.47,57.9 r270 bottom
Z9 "Zener 3.3" ONSC-SOD-123-2-425-04_V 20.48,54.09 r270 bottom
Z10 "Zener 3.3" ONSC-SOD-123-2-425-04_V 20.41,52.11 r270 top

## Footprints (in the part's own frame and the unit in brackets; to place one, negate y for a bottom-side part, rotate by r counter-clockwise, add the part's x,y. Pads: shape width x height; smd on the part's side, far side on the other; paste and mask are expansions set on the pad)
09455459011 [mm]
  round 1.4 hole 0.9: 1(0,0) 2(0,-3) 3(0,-6) 4(3,1.5) 5(3,-1.5) 6(3,-4.5) 7(3,-7.5) 8(6,0) 9(6,-3) 10(6,-6) MH1(11.3,4.675) MH2(11.3,-10.675) MH5(19.8,4.675) MH6(19.8,-10.675)
  round 1.5 hole 3 unplated: MH3(16.3,0.75) MH4(16.3,-6.75)
  silkscreen extent -0.1,-10.8 27.5,4.8, body extent -0.46,-10.8 28.33,4.8, height 12.14
AVAG-HSMX-C170_V [mm] "SMD, 2-Leads, Body 2x1.25mm, Height 0.8mm"
  rect 1.2x1.2 smd: 1(-1.05,0) 2(1.05,0)
  silkscreen extent 2.15,-0.63 2.15,0.63, body extent -1,-0.63 1,0.63, height 0.8
BGA81C100P9X9_1100X1100X350 [mm] "BGA, 81-Leads, Body 11,00x11,00mmx3,50mm, Pitch 1,00mm"
  rect 1.665x1.665 hole 1.11: 1(0,0)
  round 1.665 hole 1.11: 2(2.54,0) 3(5.08,0)
  silkscreen extent -3.21,-2.5 8.29,5.55, body extent -3.21,-2 8.29,5.55, height 10.68
DIOD-DO-41-P-2_V [mm] "2-Leads, Axial Lead, Body 4.635x2.36mm, Pin Spacing 9mm"
  rect 1.65x1.65 hole 1.15: 1(-4.5,0)
  round 1.65 hole 1.15: 2(4.5,0)
  silkscreen extent -2.32,-1.18 2.32,1.18, body extent -4.93,-1.18 4.93,1.18, height 2.36
FP-0466-MFG [mil]
  rect 45x80 smd paste+0 mask+0: 1(-52.5,0) 2(52.5,0)
  silkscreen extent -15,-32 15,32, body extent -63,-30 63,30, height 23
FP-1812CAN-MFG [mm]
  rect 1x1.15 smd paste+0 mask+0: 1(-1.84,-0.865) 2(1.84,-0.865) 3(1.84,0.865) 4(-1.84,0.865)
  silkscreen extent -1.96,-2.27 0.96,1.59, body extent -2.58,-1.69 2.58,1.69, height 0.25
FP-3296W-MFG [mm]
  rect 1.2x1.2 hole 0.7 paste-2539.97 mask+0: 1(0.005,-2.54)
  round 1.2 hole 0.7 paste-2539.97 mask+0: 2(0.005,0) 3(0.005,2.54)
  silkscreen extent -2.48,-4.89 2.48,4.89, body extent -2.58,-4.99 2.58,4.99, height 0.25
FP-43650-0228-MFG [mm]
  rect 1.57x1.57 hole 1.02 paste-2539.97 mask+0: 1(1.5,-0.315)
  round 1.57 hole 1.02 paste-2539.97 mask+0: 2(-1.5,-0.315)
  round 1.27 hole 1.27 unplated paste-2539.97 mask+0: ""(-4.5,-2.275) ""(4.5,-2.275)
  silkscreen extent -4.95,-3.04 4.95,3.98, body extent -5.24,-3.14 5.24,3.14, height 0.25
FP-95503-2661-MFG [mm]
  rect 1.4x1.4 hole 0.9 paste-2539.97 mask+0: 1(3.175,3.77)
  round 1.4 hole 0.9 paste-2539.97 mask+0: 2(1.905,6.31) 3(0.635,3.77) 4(-0.635,6.31) 5(-1.905,3.77) 6(-3.175,6.31)
  round 3.25 hole 3.25 unplated paste-2539.97 mask+0: ""(-5.08,-2.58) ""(5.08,-2.58)
  silkscreen extent -6.68,-7.69 7.3,7.69, body extent -6.81,-7.79 6.81,7.79, height 0.25
FP-CL21-IPC_B [mm]
  rect 1.255x1.456 smd paste+0 mask+0: 1(-0.826,0) 2(0.826,0)
  silkscreen extent -1.45,-1.13 1.45,1.13, body extent -1,-0.63 1,0.63, height 1.45
FP-DBV0005A-IPC_B [mm]
  rect 1.505x0.572 smd paste+0 mask+0: 1(-1.1,0.95)
  rrect100% 1.505x0.572 smd paste+0 mask+0: 2(-1.1,0) 3(-1.1,-0.95) 4(1.1,-0.95) 5(1.1,0.95)
  silkscreen extent -2.65,-1.7 1.4,1.7, body extent -2.1,-1.7 2.1,1.7, height 0.25
FP-MCU0805-MFG [mm]
  rect 0.9x1.4 smd paste+0 mask+0: 1(-0.9,0) 2(0.9,0)
  silkscreen extent 0,-0.7 0,0.7, body extent -1,-0.63 1,0.63, height 0.55
FP-SOT323-MFG [mm]
  rect 0.55x0.6 smd paste-1000 mask+0: 1(-0.925,0.65) 2(-0.925,-0.65) 3(0.925,0)
  silkscreen extent -0.28,-1.1 0.67,1.1, body extent -1.2,-1.27 1.2,1.38, height 0.25
FP-T491B226K016AT-MFG [mm]
  rect 1.42x2.13 smd paste+0 mask+0: 1(-1.35,0) 2(1.35,0)
  silkscreen extent -1.85,-1.5 3.05,1.5, body extent -2.18,-1.62 2.18,1.62, height 0.25
IND_RLS-126 [mm]
  rect 2.05x3.5 smd: 1(-1.375,0) 2(1.375,0)
LFXTAL003181-Footprint-1 [mm]
  rect 5.5x2 smd: 1(-4.75,0) 2(4.75,0)
  silkscreen extent -5.5,-1.9 5.5,1.9, body extent -7.3,-1.9 7.3,1.9, height 5
ONSC-SOD-123-2-425-04_V [mm] "SOD, 2-Leads, Body 2.69x1.6mm"
  rect 0.91x1.22 smd: 1(-1.635,0) 2(1.635,0)
  silkscreen extent -1.76,-0.8 0.78,1.28, body extent -1.35,-0.8 1.35,0.8, height 1.35
P0008A [mm] "DIP, 8-Leads, Body 10.15x6.6mm, Pitch 2.54mm"
  rect 1.5x1.5 hole 0.9: 1(-3.81,3.81)
  round 1.5 hole 0.9: 2(-3.81,1.27) 3(-3.81,-1.27) 4(-3.81,-3.81) 5(3.81,-3.81) 6(3.81,-1.27) 7(3.81,1.27) 8(3.81,3.81)
  silkscreen extent -3.94,-5.1 2.65,5.23, body extent -3.95,-5.07 3.95,5.07, height 5.08
R-78C5.0-1.0-Footprint-1 [mm]
  rect 1.7x1.7 hole 1: 1(0,0)
  round 1.7 hole 1: 2(2.54,0) 3(5.08,0)
  silkscreen extent -3.26,-2 8.34,6.5, body extent -3.26,-2.01 8.34,6.5, height 10.33
RESC2013X60X35LL10T20 [mm] "Chip Resistor, 2-Leads, Body 2.1x1.35mm, IPC High Density"
  rect 0.8x1.25 smd: 1(-0.8,0) 2(0.8,0)
  silkscreen extent -0.1,-0.53 0.1,0.53, body extent -1.05,-0.67 1.05,0.68, height 0.6
SOIC127P600X175-8N [mm]
  rect 1.5x0.65 smd: 1(-2.7,1.905) 2(-2.7,0.635) 3(-2.7,-0.635) 4(-2.7,-1.905) 5(2.7,-1.905) 6(2.7,-0.635) 7(2.7,0.635) 8(2.7,1.905)
  silkscreen extent -3.45,-2.45 1.6,2.58, body extent -3,-2.45 3,2.45, height 1.75
SOP65P490X110-12N [mm]
  rect 1.425x0.45 smd: 1(-2.212,1.625) 2(-2.212,0.975) 3(-2.212,0.325) 4(-2.212,-0.325) 5(-2.212,-0.975) 6(-2.212,-1.625) 7(2.212,-1.625) 8(2.212,-0.975) 9(2.212,-0.325) 10(2.212,0.325) 11(2.212,0.975) 12(2.212,1.625)
  silkscreen extent -2.93,-2.02 1.15,2.2, body extent -2.45,-2.02 2.45,2.02, height 1.1
TMK212BJ105KG-T-Footprint-1 [mm]
  rect 0.96x1.39 smd: 1(-0.79,0) 2(0.79,0)
  body extent -1,-0.63 1,0.63, height 1.35
TQFP-PT100_L [mm] "Thin QFP, 100-Leads, Body 12x12mm, Pitch 0.4mm, IPC High Density"
  oval 1.55x0.2 smd: 1(-6.525,4.8) 2(-6.525,4.4) 3(-6.525,4) 4(-6.525,3.6) 5(-6.525,3.2) 6(-6.525,2.8) 7(-6.525,2.4) 8(-6.525,2) 9(-6.525,1.6) 10(-6.525,1.2) 11(-6.525,0.8) 12(-6.525,0.4) 13(-6.525,0) 14(-6.525,-0.4) 15(-6.525,-0.8) 16(-6.525,-1.2) 17(-6.525,-1.6) 18(-6.525,-2) 19(-6.525,-2.4) 20(-6.525,-2.8) 21(-6.525,-3.2) 22(-6.525,-3.6) 23(-6.525,-4) 24(-6.525,-4.4) 25(-6.525,-4.8) 51(6.525,-4.8) 52(6.525,-4.4) 53(6.525,-4) 54(6.525,-3.6) 55(6.525,-3.2) 56(6.525,-2.8) 57(6.525,-2.4) 58(6.525,-2) 59(6.525,-1.6) 60(6.525,-1.2) 61(6.525,-0.8) 62(6.525,-0.4) 63(6.525,0) 64(6.525,0.4) 65(6.525,0.8) 66(6.525,1.2) 67(6.525,1.6) 68(6.525,2) 69(6.525,2.4) 70(6.525,2.8) 71(6.525,3.2) 72(6.525,3.6) 73(6.525,4) 74(6.525,4.4) 75(6.525,4.8)
  oval 0.2x1.55 smd: 26(-4.8,-6.525) 27(-4.4,-6.525) 28(-4,-6.525) 29(-3.6,-6.525) 30(-3.2,-6.525) 31(-2.8,-6.525) 32(-2.4,-6.525) 33(-2,-6.525) 34(-1.6,-6.525) 35(-1.2,-6.525) 36(-0.8,-6.525) 37(-0.4,-6.525) 38(0,-6.525) 39(0.4,-6.525) 40(0.8,-6.525) 41(1.2,-6.525) 42(1.6,-6.525) 43(2,-6.525) 44(2.4,-6.525) 45(2.8,-6.525) 46(3.2,-6.525) 47(3.6,-6.525) 48(4,-6.525) 49(4.4,-6.525) 50(4.8,-6.525) 76(4.8,6.525) 77(4.4,6.525) 78(4,6.525) 79(3.6,6.525) 80(3.2,6.525) 81(2.8,6.525) 82(2.4,6.525) 83(2,6.525) 84(1.6,6.525) 85(1.2,6.525) 86(0.8,6.525) 87(0.4,6.525) 88(0,6.525) 89(-0.4,6.525) 90(-0.8,6.525) 91(-1.2,6.525) 92(-1.6,6.525) 93(-2,6.525) 94(-2.4,6.525) 95(-2.8,6.525) 96(-3.2,6.525) 97(-3.6,6.525) 98(-4,6.525) 99(-4.4,6.525) 100(-4.8,6.525)
  silkscreen extent -6.65,-5.35 5.35,5.57, body extent -6,-6 6,6, height 1.2
VCAS080530C650DP-Footprint-1 [mm]
  rect 0.8x1.25 smd: 1(0.597,0.635) 2(2.197,0.635)
  silkscreen extent 1.3,0.11 1.5,1.16, body extent 0.35,-0.04 2.45,1.31, height 0.6

## Part data
1 2: library part CMP-004-00011-5, "PESD1CAN Series 50 V 9.3 pF SMT CAN bus ESD Protection Diode - SOT-323"
C1 C2 C3 C4 C5 C6 C7 C8 C10 C13 C14 C15 C16 C19 C20 C21 C24 CB1 CB2 CC1 CC2 CC3 CC4 CHB1 CHB2 CHB3 CHB4 CLB1 CLB2 CLB3 CLB4: library part CMP-001-00000-1, "Cap Ceramic 1uF 25V Y5V -20% to 80% SMD 0805 85°C Embossed T/R", Case/Package=0805, Dielectric=Y5V, Max Operating Temperature=85°C, Min Operating Temperature=-30°C, Package Quantity=10000, Tolerance=80%, Voltage Rating=25V, Construction=Flat, Depth=1.25mm, Height=1.25mm, Length=2mm, Mounting Technology="Surface Mount", Packaging="Tape and Reel", Radiation Hardening=No, RoHS Compliant=Yes, Series=CL, Thickness=0.053inch, Voltage Rating (DC)=25V, Width=0.049inch
C9 C18: library part CMP-000010-1, "0805 1 uF 25 V ±10 % X5R Surface Mount Multilayer Ceramic Capacitor", Case Code (Imperial)=0805, Case Code (Metric)=2012, Dielectric=X5R, Max Operating Temperature=85°C, Min Operating Temperature=-55°C, Package Quantity=3000, Tolerance=10%, Voltage Rating=25V, Case/Package=0805, Construction=Flat, Depth=1.25mm, Height=1.25mm, Lead Free="Lead Free", Length=2mm, Mounting Technology="Surface Mount", Packaging="Tape and Reel", Pins=2, Radiation Hardening=No, Reach SVHC Compliant=Unknown, RoHS Compliant=Yes, Series=M, Termination=SMD/SMT, Voltage Rating (DC)=25V, Width=1.25mm
CAN0 CAN3: library part CMP-001-0009-12, "Conn Wire to Board HDR 2 POS 3mm Solder ST Top Entry Thru-Hole Tray", Current Rating=5A, Package Quantity=3264, Voltage Rating=250V, Contact Material=Brass, Contact Plating=Gold, Glow Wire Compliant=Compliant, Halogen Free="Low Halogen", Housing Material=Thermoplastic, Number of Circuits=2, Number of Positions=2, Number of Rows=1, Orientation=Vertical, Packaging=Tray, Pitch=3mm, RoHS Compliant=Yes, Series=43650, Termination="Through Hole"
CAP1: library part CMP-03017-000029-1, "CAP TANT 22UF 10% 16V 1411", Capacitance=22uF, Case Code (Imperial)=1411, Case Code (Metric)=3528, Dielectric Material=Tantalum, ESR (Equivalent Series Resistance)=2.2R, Leakage Current=3.6uA, Max Operating Temperature=125°C, Min Operating Temperature=-55°C, Package Quantity=1, Tolerance=10%, Voltage=16V, Case/Package=1411, Depth=2.8mm, Dissipation Factor=6%, Failure Rate=0.001%, Features="General Purpose", Height=1.9mm, Height - Seated (Max)=0.083inch, Lead Free="Lead Free", Lead Pitch=1.9mm, Length=3.5mm, Life (Hours)=2000Hour, Mount="Surface Mount", Number of Pins=2, Packaging="Tape and Reel", Polarity=Polar, Radiation Hardening=No, REACH SVHC="No SVHC", RoHS Compliant=Yes, Termination=SMD/SMT, Voltage Rating=16V, Voltage Rating (DC)=16V, Weight=0.002293oz, Width=2.8mm
D2 D3 D4: library part CMP-007-00000-1, "Led 570NM Green Diff 0805 SMD", Case Code (Imperial)=0805, Case Code (Metric)=2012, Color=Green,Yellow, Forward Current=20mA, Forward Voltage=2.2V, Illumination Color=Green, Lens Color=White, Max Operating Temperature=85°C, Min Operating Temperature=-30°C, Package Quantity=4000, Power Dissipation=52mW, Reverse Voltage=5V, Case/Package=0805, Depth=1.25mm, Dominant Wavelength=572nm, Height=0.8mm, Lead Free="Lead Free", Length=2mm, Lens Style=Rectangular,Diffused,Colorless, Lens Transparency=Diffused, Luminous Intensity=15mcd, Mounting Technology="Surface Mount", Number of Elements=1, Number of LEDs=1, Packaging="Tape and Reel", Pins=2, Power Rating=52mW, Radiation Hardening=No, Reach SVHC Compliant=No, RoHS Compliant=Yes, Series=-, Test Current=20mA, Viewing Angle=170°, Wavelength=572nm, Width=1.25mm
DASH1 INT OUT1 TEMP1: library part CMP-002-00003-3, "Harting Pushpull V4 Signal, 10Pins, Panel Side Insert For Angled Solder Termination"
DR1: library part CMP-004-00000-1, "Diode Standard Recovery Rectifier 50V 1A 2-Pin DO-41 T/R", Average Rectified Current=1A, Case/Package=DO-41, Forward Voltage=1V, Max Forward Surge Current (Ifsm)=30A, Max Operating Temperature=150°C, Max Repetitive Reverse Voltage (Vrrm)=50V, Max Reverse Current=5uA, Min Operating Temperature=-65°C, Package Quantity=5000, Contact Plating=Tin, Current Rating=1A, Diameter=2.72mm, Forward Current=1A, Height=2.71mm, Lead Free="Lead Free", Length=4.7mm, Max Reverse Voltage (DC)=50V, Max Surge Current=30A, Output Current=1A, Packaging="Tape and Reel", Peak Non-Repetitive Surge Current=30A, Pins=2, Polarity=Standard, Radiation Hardening=No, Reach SVHC Compliant=No, Recovery Time=2us, Reverse Voltage (DC)=50V, RoHS Compliant=Yes, Series=-, Termination="Through Hole", Voltage Rating (DC)=50V, Weight=0.010582oz, Width=2.71mm
F1 F2 F3: library part CMP-005-00001-1, "Fuse Chip Very Fast Acting 1A 63V SMD Solder Pad 1206 T/R CSA", Case Code (Imperial)=1206, Case Code (Metric)=3216, Current Rating=1A, DC Cold Resistance=76mR, Max Operating Temperature=90°C, Min Operating Temperature=-55°C, Package Quantity=5000, Voltage Rating=63V, Approvals=UL,CSA, Case/Package=1206, Depth=1.52mm, Fuse Current=1A, Fuse Type="Board Mount (Cartridge Style Excluded)", Height=0.023inch, Housing Material=Ceramic, Lead Free="Lead Free", Length=3.18mm, Mounting Technology="Surface Mount", Packaging="Tape and Reel", Pins=2, Radiation Hardening=No, Reach SVHC Compliant=No, RoHS Compliant=Yes, Series=466, Terminal Material=Copper, Voltage Rating (AC)=63V, Voltage Rating (DC)=63V, Width=1.52mm, Working Voltage=63V
ICSP1: library part CMP-001-0019-1, "Modular Jack, Vertical, Top Entry, Through Hole, 6/6, No Key Version, Tray", Color=Black, Current Rating=1.5A, Max Operating Temperature=80°C, Max Voltage Rating (DC)=125V, Min Operating Temperature=-40°C, Package Quantity=3094, Contact Material="Copper Alloy,Brass,Gold", Contact Plating=Gold, Depth=15.08mm, Gender=Female, Halogen Free="Low Halogen", Housing Color=Black, Housing Material=Thermoplastic, Length=13.21mm, Mounting Technology="Through Hole", Number of Contacts=6, Number of Ports=1, Number of Positions=6, Number of Positions Loaded=6, Number of Ways=6, Orientation=Straight, Packaging=Tray, Pitch=2.54mm, Reach SVHC Compliant=Unknown, RoHS Compliant=Yes, Series=95503, Shielding=Unshielded, Termination="Through Hole", Voltage Rating=125V, Voltage Rating (DC)=125V, Width=13.21mm
INA1 INA2 INA3 INA4: library part CMP-014-00005-1, "Instrument Amplifier, 1, 1 Mv, 0.07 V/ S, 600 Khz, 2.25V To 18V, Dip Rohs Compliant: Yes", Case/Package=P, Dual Supply Voltage=15V, Input Bias Current=50pA, Input Offset Voltage (Vos)=1mV, Input Resistance=1000GR, Input Voltage Noise Density="20nV/sqrt Hz", Max Dual Supply Voltage=18V, Max Operating Temperature=85°C, Max Supply Current=525uA, Max Supply Voltage=36V, Min Dual Supply Voltage=2.25V, Min Operating Temperature=-40°C, Min Supply Voltage=4.5V, Operating Supply Current=450uA, Output Current per Channel=14mA, Package Quantity=50, Voltage Gain=80dB, -3db Bandwidth=600kHz, Bandwidth=600kHz, Common Mode Rejection Ratio=90dB, Gain Bandwidth Product=600kHz, Height=4.57mm, Lead Free="Lead Free", Length=9.81mm, Number of Amplifiers=1, Number of Channels=1, Number of Circuits=1, Number of Elements=3, Packaging=Rail/Tube, Pins=8, Quiescent Current=450uA, Radiation Hardening=No, Reach SVHC Compliant=No, RoHS Compliant=Yes, Series=INA121, Slew Rate=0.07V/µs, Supply Current=525uA, Termination="Through Hole", Weight=0.018646oz, Width=6.35mm
L1 L3: library part CMP-000005-4, "Common Mode Choke, 30% tol, SMT, RoHS, halogen-free", RoHS Compliant=Yes
L2 L4: library part CMP-036-000000-1, "Line Inductors for RECOM Power Supply", Package="1812 Recom Power", Availability=Unavailable, Component Type=Standard, Design Item ID=RLS-126, MF="Recom Power", MP=RLS-126, Pin Count=2, Price=None, SnapEDA_Link=https://www.snapeda.com/parts/RLS-126/Recom%20Power/view-part/3594564/?ref=snap, Source=SnapEDAsch.SchLib
LTC1: "Integrated Circuit", Manufacturer_Name="Analog Devices", Mouser Part Number=584-C2644CMS-L12PBF, Arrow Part Number=LTC2644CMS-L12#PBF, Arrow Price/Stock=https://www.arrow.com/en/products/ltc2644cms-l12pbf/analog-devices, Datasheet Link=https://www.analog.com/media/en/technical-documentation/data-sheets/2644fa.pdf, Height=1.1mm, Manufacturer_Part_Number=LTC2644CMS-L12#PBF, Mouser Price/Stock=https://www.mouser.co.uk/ProductDetail/Analog-Devices/LTC2644CMS-L12PBF?qs=hVkxg5c3xu80urzBoeNBsQ%3D%3D
"OSC 1": library part CMP-003-00000-3, "LFXTAL003181 - Crystal 20MHZ 16PF 2-PIN HC-49/4H Smx Bulk", Frequency=20MHz, Frequency Stability=50ppm, Frequency Tolerance=30ppm, Load Capacitance=16pF, Max Operating Temperature=60°C, Min Operating Temperature=-10°C, ESR=50R, Height=4mm, Length=11.05mm, Mounting Technology="Surface Mount", Packaging="Tape and Reel", Pins=2, Reach SVHC Compliant=No, Series="HC49/4H SMX", Size=4.3mm, Width=4.7mm
R1: library part CMP-009-00016-1, "SMD Chip Resistor, 10 kOhm, ± 0.1%, 125 mW, 0805 [2012 Metric], Thin Film, Precision", Case/Package=0805, Max Operating Temperature=125°C, Max Power Dissipation=125mW, Min Operating Temperature=-55°C, Package Quantity=1000, Temperature Coefficient=25ppm/°C, Tolerance=0.1%, Voltage Rating=150V, Voltage Rating (DC)=100V, Contact Plating=Tin, Height=0.022inch, Lead Free="Lead Free", Length=0.079inch, Number of Terminations=2, Packaging="Tape and Reel", Radiation Hardening=No, RoHS Compliant=Yes, Series="MCU 0805 - Precision", Width=0.049inch
R2 R3 R4 R6 R7 R8 R9 R11 R12 R13 R14 R15 R16 R17 R18 R19 R20 R25 R26 R27 R31 R33 R36 R37 R38 R39 R40 R41 RCH1 RCH2 RCL1 RCL2: library part CMP-009-00000-1, "SMD Chip Resistor, 10 kOhm, ± 1%, 125 mW, 0805 [2012 Metric], Thick Film, General Purpose", Case Code (Imperial)=0805, Case Code (Metric)=2012, Max Operating Temperature=155°C, Max Power Dissipation=125mW, Min Operating Temperature=-55°C, Package Quantity=1, Resistance Tolerance=1%, Resistor Type="Thick Film", Temperature Coefficient=100ppm/°C, Voltage Rating=150V, Case/Package=0805, Construction=Rectangular, Depth=1.25mm, Features="Moisture Resistant", Height=0.024inch, Lead Free="Lead Free", Length=0.079inch, Military Standard=Not, Number of Terminations=2, Packaging="Tape and Reel", Power Rating=125mW, Reach SVHC Compliant=Unknown, RoHS Compliant=Yes, Series=RC, Technology="THICK FILM", Termination=SMD/SMT, Tolerance=1%, Width=0.049inch
R5 R10 R28 R29 R30 R32 R34 R35: library part CMP-009-00016-2, "SMD Chip Resistor, 10 kOhm, ± 0.1%, 125 mW, 0805 [2012 Metric], Thin Film, Precision", Case/Package=0805, Max Operating Temperature=125°C, Max Power Dissipation=125mW, Min Operating Temperature=-55°C, Package Quantity=1000, Temperature Coefficient=25ppm/°C, Tolerance=0.1%, Voltage Rating=150V, Voltage Rating (DC)=100V, Contact Plating=Tin, Height=0.022inch, Lead Free="Lead Free", Length=0.079inch, Number of Terminations=2, Packaging="Tape and Reel", Radiation Hardening=No, RoHS Compliant=Yes, Series="MCU 0805 - Precision", Width=0.049inch
R21 R22 R23 R24: library part CMP-009-00006-1, "Trimmer Potentiometer 2k Ohm 10% 1/2 Watt 25 Turn 2.19mm Pin Through Hole", Color=Blue, Max Operating Temperature=125°C, Max Power Dissipation=500mW, Min Operating Temperature=-55°C, Resistance Tolerance=10%, Resistor Type=Cermet, Temperature Coefficient=100ppm/°C, Voltage Rating (AC)=300V, Depth=4.83mm, Height=11.55mm, Lead Free="Lead Free", Length=9.53mm, Military Standard=Not, Mounting Technology="Through Hole,Panel,PCB", Number of Turns=25, Packaging=Rail/Tube, Power Rating=500mW, Radiation Hardening=No, Reach SVHC Compliant=No, RoHS Compliant=Yes, Series=3296, Taper=Linear, Technology=CERMET, Termination=Pin, Tolerance=10%, Weight=0.03oz, Width=9.53mm
RV1: library part CMP-00000-4, "Varistor, 67V, 21Vac, 30Vdc, 0805", Case Code (Imperial)=0805, Case Code (Metric)=2012, Clamping Current=1A, Clamping Voltage=67V, Max Operating Temperature=125°C, Max Surge Current=80A, Max Varistor Voltage=45.1V, Max Voltage Rating (AC)=21V, Max Voltage Rating (DC)=30V, Min Operating Temperature=-55°C, Min Varistor Voltage=36.9V, Package Quantity=1000, Tolerance=10%, Varistor Voltage=41V, Case/Package=0805, Energy=0.3J, Mounting Technology="Surface Mount", Number of Circuits=1, Packaging="Tape and Reel", Reach SVHC Compliant=No, RoHS Compliant=Yes, Series=TransGuard®, Termination=SMD/SMT, Voltage Rating (AC)=21V, Voltage Rating (DC)=30V, Width=1.25mm
U1: library part CMP-000080-1, "R-78K-1.0 Series Single Output 3.3 V 1 A Non Isolated DC/DC Converter - SIP-3"
U1: library part CMP-0232-00012-1, "General Purpose 16-bit Microcontroller with USB, Enhanced Performance Flash Memory, 512 KB Program Memory, 100-Pin TQFP (PT), Industrial Temperature", ComponentLink1Description=Datasheet, ComponentLink1URL=http://ww1.microchip.com/downloads/en/DeviceDoc/70616E.pdf, ComponentLink2Description="Packaging Specification", ComponentLink2URL=http://www.microchip.com/stellent/groups/techpub_sg/documents/packagingspec/en012702.pdf, ComponentLink3Description="Microchip.com Home", ComponentLink3URL=http://www.microchip.com/, DatasheetVersion=Aug-2011, PackageDescription="100-Lead Plastic Thin Quad Flatpack (PT) - 12x12x1mm Body, 2.00mm [TQFP]", PackageReference=TQFP-PT100, PackageVersion="revBB, Aug-2009"
U2: library part CMP-000001-5, "1A DC/DC-Converter 'INNOLINE' SIP3 reg; V. In: 8-42; V. Out: 5.0; mA. Out: 1000", Current - Output 1=1A, Max Input Voltage (DC)=42V, Max Operating Temperature=85°C, Max Output Power=5W, Max Output Voltage=5V, Min Input Voltage=8V, Min Operating Temperature=-40°C, Package Quantity=42, Depth=11.6mm, Efficiency=93%, Features=OTP,SCP, Height=10.4mm, Lead Free="Lead Free", Length=11.6mm, Max Output current=1A, Max Power Dissipation=5W, Max Supply Voltage=42V, Min Input Voltage (DC)=8V, Mounting Technology="Through Hole,PCB", Nominal Output Voltage=5V, Number of Outputs=1, Output Current=1A, Output Power=5W, Output Voltage=5V, Packaging=Rail/Tube, Pins=3, Pitch=2.54mm, Power Rating=5W, Reach SVHC Compliant=No, RoHS Compliant=Yes, Series="INNOLINE R-78C-1.0", Voltage - Output 1=5V, Weight=2g, Width=8.5mm
U3 U4 U5 U6 U7 U8 U9: library part CMP-014-00006-1, "Single 1MHz, 40-V rail-to-rail input/output, low-offset-voltage, low-power op amp 5-SOT-23 -40 to 125"
UC1 UC2: "Integrated Circuit", Arrow Part Number=MCP2562FDT-E/SN, Manufacturer_Name=Microchip, Mouser Part Number=579-MCP2562FDT-E/SN, Arrow Price/Stock=https://www.arrow.com/en/products/mcp2562fdt-esn/microchip-technology?utm_currency=USD&region=nac, Datasheet Link=https://ww1.microchip.com/downloads/en/DeviceDoc/20005284A.pdf, Height=1.75mm, Manufacturer_Part_Number=MCP2562FDT-E/SN, Mouser Price/Stock=https://www.mouser.co.uk/ProductDetail/Microchip-Technology/MCP2562FDT-E-SN?qs=YlpJWyuQ3PNwRkBGVHsNkA%3D%3D
Z1 Z2 Z3 Z4 Z5 Z7 Z8 Z9: library part CMP-004-00007-2, "Diode Zener Single 3.6V 5% 500mW Automotive 2-Pin SOD-123 T/R", Case/Package=SOD-123-2, Forward Voltage=900mV, Max Operating Temperature=150°C, Max Power Dissipation=500mW, Max Reverse Current=50nA, Max Reverse Leakage Current=7.5uA, Min Operating Temperature=-55°C, Package Quantity=3000, Test Current=50uA, Tolerance=5%, Voltage Rating (DC)=20V, Zener Voltage=3.6V, Height=1.25mm, Lead Free="Lead Free", Length=2.84mm, Packaging="Tape and Reel", Pins=2, Power Dissipation=500mW, Power Rating=500mW, Radiation Hardening=No, Reach SVHC Compliant=No, RoHS Compliant=Yes, Series=-, Voltage Tolerance=5%, Width=1.8mm, Working Voltage=20V, Zener Current=50uA
Z6 Z10: library part CMP-004-00004-1, "MMSZ5226BT1 Series 500 mW 10 mA 5.1V SMT Zener Voltage Regulator - SOD-123", Breakdown Voltage=3.47V, Case/Package=SOD-123-2, Forward Voltage=900mV, Max Operating Temperature=150°C, Max Power Dissipation=500mW, Max Reverse Current=25uA, Min Operating Temperature=-55°C, Package Quantity=3000, Test Current=20mA, Tolerance=5%, Voltage Rating (DC)=3.3V, Zener Current=10mA, Diode Type=ZENER, Height=1.12mm, Impedance=28R, Lead Free="Lead Free", Length=2.69mm, Material=Plastic, Max Reverse Leakage Current=25uA, Packaging="Tape and Reel", Pins=2, Power Dissipation=500mW, Power Rating=500mW, Radiation Hardening=No, Reach SVHC Compliant=No, RoHS Compliant=Yes, Series=-, Voltage Tolerance=5%, Width=1.6mm, Working Voltage=3.3V, Zener Voltage=3.3V

## Via types
v1: diameter 0.85, hole 0.5, Top Layer to Bottom Layer, 59 vias
v2: diameter 2, hole 2, Top Layer to Bottom Layer, 4 vias

## Nets (pads, with @x,y where several pads share a name; then routed paths per layer and width w, separated by ;. In a path a pad name is that pad's centre, name@x,y a point inside that pad or via, vN(x,y) a via of type N, cw(c..) or ccw(c..) an arc to the next point about the centre after c; other vN are vias at no path point)
1+: INA3.2 R14.2 TEMP1.1 | length 17.4
  Top Layer w0.254: TEMP1.1@47.08,19.77 59.69,19.77 INA3.2@60.75,20.83 63.547,20.83 63.82,21.103 R14.2@63.82,21.17
2+: INA1.2 R16.2 TEMP1.3 | length 14.6
  Top Layer w0.254: R16.2@28.66,24.71 28.66,24.623 28.933,24.35 31.363,24.35 31.623,24.09 INA1.2@31.96,24.09
  Layer 1 w0.254: INA1.2@31.96,24.09 INA1.2@32.015,24.145 ; TEMP1.3@41.045,19.805 TEMP1.3@41.08,19.77
  Layer 4 w0.254: INA1.2@31.96,24.09 33.71,22.34 38.51,22.34 TEMP1.3@41.08,19.77
3+: INA2.2 R18.2 TEMP1.5 | length 23.1
  Top Layer w0.254: INA2.2@61.24,6.1 64.41,6.1 R18.2@64.47,6.04
  Layer 1 w0.254: TEMP1.5@45.73,16.67 46.47,16.67 57.04,6.1 INA2.2@61.24,6.1